# Altium PCB PCB2.PcbDoc
Units mm, origin at the board's own origin, x right, y up, seen from the top; angles counter-clockwise.
Board outline 98.2 x 49.05 mm, 2 copper layers (Top Layer, Bottom Layer); 60 components, 0 nets, 194 pads, 48 vias.
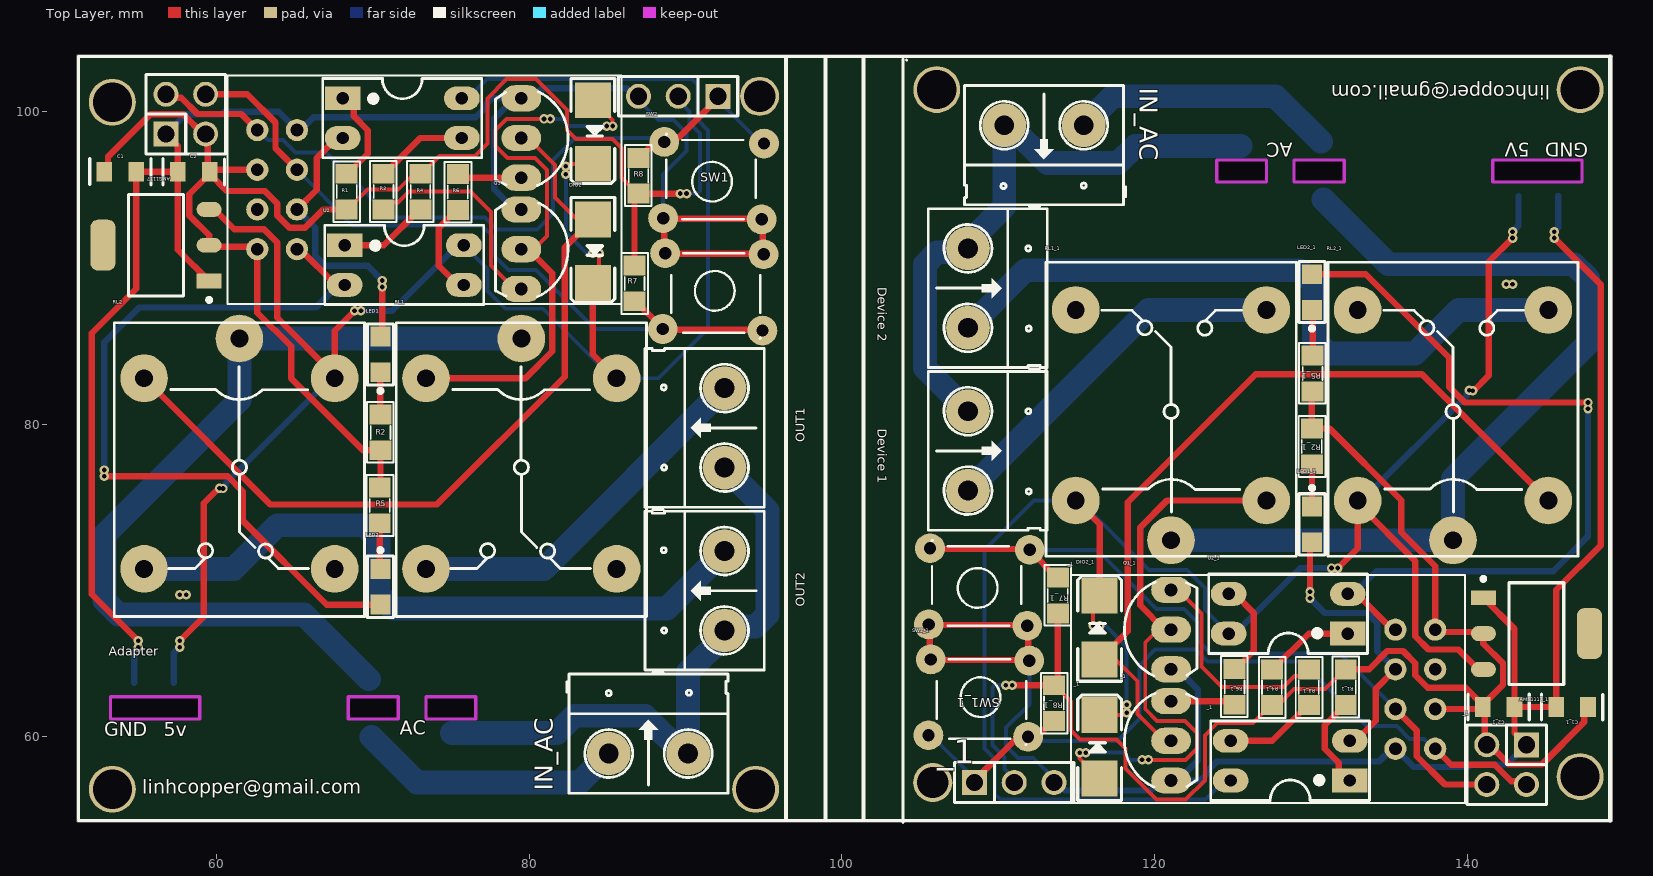
[diagram p0: Top Layer view]
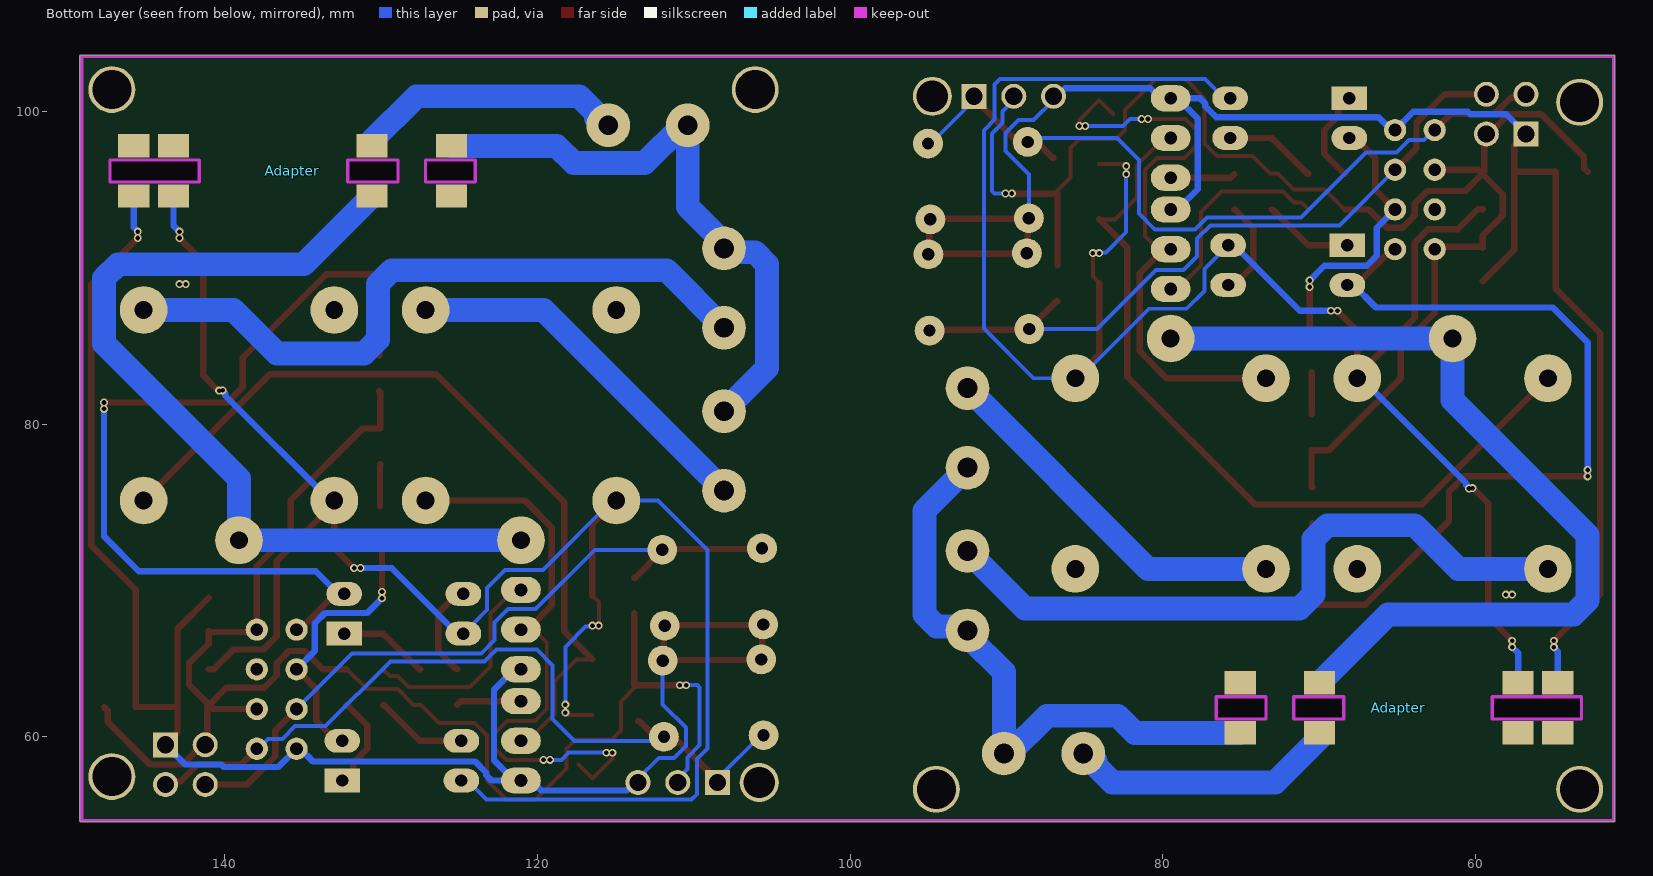
[diagram p1: Bottom Layer view, seen from below]

## Layer stack, top to bottom
Top Solder: solder mask 0.0102, Solder Resist, Dk 3.5
Top Layer: signal copper 0.0356
Dielectric 1: dielectric 0.32, FR-4, Dk 4.8
Bottom Layer: signal copper 0.0356
Bottom Solder: solder mask 0.0102, Solder Resist, Dk 3.5

## Board outline
51.089,54.696 cw(c51.181,54.737) 51.081,54.737 51.081,103.505 cw(c51.181,103.505) 51.181,103.605 149.181,103.605 cw(c149.181,103.505) 149.281,103.505 149.281,103.504 ccw(c149.181,103.505) 149.281,103.505 149.281,103.504 149.281,54.693 cw(c149.181,54.693) 149.28,54.674 cw(c149.181,54.655) 149.281,54.655 cw(c149.181,54.655) 149.181,54.555 51.181,54.555 cw(c51.181,54.655)

## Design rules (kind name [scope] priority, off if disabled: settings)
Clearance [All] p1: gap=0.254 ignorepadtopadclearanceinfootprint=FALSE except(0: Arc-Hole Track-Hole SMDPad-Hole THPad-Hole Via-Hole Fill-Hole Poly-Hole Region-Hole Text-Hole)
PolygonConnect [All] p1: connectstyle=Relief reliefconductorwidth=0.254 reliefentries=4 polygonreliefangle="90 Angle" airgapwidth=0.254
RoutingVias [All] p1: holewidth=0.711 width=1.27 viastyle="Through Hole" minholewidth=0.711 minwidth=1.27 maxholewidth=0.711 maxwidth=1.27
SolderMaskExpansion [All] p1: expansion=0.102 istentingtop=FALSE
Width [All] p1: maxlimit=0.254 minlimit=0.254 preferedwidth=0.254
30 further rules are at their usual default settings.

## Components (designator, comment, footprint, x,y, rotation, side; value= is the part's Value field where it differs from the comment)
_1 "JP3" JP3-D1T 108.483,57.074 r0 top (schematic designator C4)
_1 "Power" JP2-D2T 142.519,58.217 r180 top locked (schematic designator C3)
_1 "ESP-01" ESP8266 136.5,62.992 r270 top locked (schematic designator U3)
_1 "PC817" DIP4 132.486,57.201 r90 top locked (schematic designator U1)
_1 "2SC1815" TO92-123 121.056,59.741 r90 top locked value=C1815 (schematic designator Q2)
_1 "Diode SMD" DIO-SMD-106 116.484,59.36 r270 top locked value=1N5007 (schematic designator DIO1)
Adapter "power_220v_to_5v" POWER_220V_TO_5V 136.931,96.19 r270 top
Adapter "power_220v_to_5v" POWER_220V_TO_5V 63.627,61.849 r90 top
AMS1117 "AMS1117-3.3" Advanced_Monolithic_Systems_AMS1117_IPC_A 56.134,91.44 r180 top locked
AMS1117_1 "AMS1117-3.3" Advanced_Monolithic_Systems_AMS1117_IPC_A 144.424,66.599 r0 top locked (schematic designator AMS1117)
C1 "Capacitor Ceramic" C0805 53.848,96.139 r180 top value=33p
C1_1 "Capacitor Ceramic" C0805 146.71,61.9 r0 top value=33p (schematic designator C1)
C2 "Capacitor Ceramic" C0805 58.547,96.139 r0 top locked value=33p
C2_1 "Capacitor Ceramic" C0805 142.011,61.9 r180 top locked value=33p (schematic designator C2)
C3 "Power" JP2-D2T 58.039,99.822 r0 top locked
C4 "JP3" JP3-D1T 92.075,100.965 r180 top locked
"Device 1" "" HED2 108.064,80.823 r270 top locked value="Header 2" (schematic designator OUT1)
"Device 2" "" HED2 108.064,91.237 r270 top locked value="Header 2" (schematic designator OUT2)
DIO1 "Diode SMD" DIO-SMD-106 84.074,98.679 r90 top locked value=1N5007
DIO2 "Diode SMD" DIO-SMD-106 84.074,91.059 r90 top value=1N5007
DIO2_1 "Diode SMD" DIO-SMD-106 116.484,66.98 r270 top value=1N5007 (schematic designator DIO2)
IN_AC "" HED2 115.468,99.111 r180 top value="Header 2"
IN_AC "" HED2 85.09,58.928 r0 top value="Header 2"
LED1 "" LED0805 70.485,84.455 r90 top locked
LED1_1 "" LED0805 130.073,73.584 r270 top locked (schematic designator LED1)
LED2 "" LED0805 70.485,69.596 r270 top
LED2_1 "" LED0805 130.073,88.443 r90 top (schematic designator LED2)
OUT1 "" HED2 92.494,77.216 r90 top locked value="Header 2"
OUT2 "" HED2 92.494,66.802 r90 top locked value="Header 2"
Q1 "2SC1815" TO92-123 79.502,91.186 r270 top locked value=C1815
Q1_1 "2SC1815" TO92-123 121.056,66.853 r90 top locked value=C1815 (schematic designator Q1)
Q2 "2SC1815" TO92-123 79.502,98.298 r270 top locked value=C1815
R1 "" SM-0805 68.326,94.869 r90 top locked value=1K
R1_1 "" SM-0805 132.232,63.17 r270 top locked value=1K (schematic designator R1)
R2 "" SM-0805 70.496,79.466 r270 top value=1K
R2_1 "" SM-0805 130.062,78.573 r90 top value=1K (schematic designator R2)
R3 "" SM-0805 70.688,94.869 r270 top locked value=1K
R3_1 "" SM-0805 129.87,63.17 r90 top locked value=1K (schematic designator R3)
R4 "" SM-0805 73.05,94.869 r270 top locked value=1K
R4_1 "" SM-0805 127.508,63.17 r90 top locked value=1K (schematic designator R4)
R5 "" SM-0805 70.449,74.803 r90 top value=1K
R5_1 "" SM-0805 130.11,83.236 r270 top value=1K (schematic designator R5)
R6 "" SM-0805 75.438,94.844 r90 top value=1K
R6_1 "" SM-0805 125.12,63.195 r270 top value=1K (schematic designator R6)
R7 "" SM-0805 86.741,89.002 r90 top value=1K
R7_1 "" SM-0805 113.817,69.037 r270 top value=1K (schematic designator R7)
R8 "" SM-0805 86.995,95.885 r270 top value=1K
R8_1 "" SM-0805 113.563,62.154 r90 top value=1K (schematic designator R8)
RL1 "Relay 10A/12V" RL_SPDT_10A 79.502,85.471 r270 top locked value="Relay SPDT, 10A, 12V"
RL1_1 "Relay 10A/12V" RL_SPDT_10A 121.056,72.568 r90 top locked value="Relay SPDT, 10A, 12V" (schematic designator RL1)
RL2 "Relay 10A/12V" RL_SPDT_10A 61.468,85.471 r270 top locked value="Relay SPDT, 10A, 12V"
RL2_1 "Relay 10A/12V" RL_SPDT_10A 139.09,72.568 r90 top locked value="Relay SPDT, 10A, 12V" (schematic designator RL2)
SW1 "SW" SW4 88.697,90.932 r0 top locked value="Button chip 4 pin"
SW1_1 "SW" SW4 111.862,67.107 r180 top locked value="Button chip 4 pin" (schematic designator SW1)
SW2 "SW" SW4 94.869,93.091 r180 top locked value="Button chip 4 pin"
SW2_1 "SW" SW4 105.689,64.948 r0 top locked value="Button chip 4 pin" (schematic designator SW2)
U1 "PC817" DIP4 68.072,100.838 r270 top locked
U2 "PC817" DIP4 68.199,91.44 r270 top locked
U2_1 "PC817" DIP4 132.359,66.599 r90 top locked (schematic designator U2)
U3 "ESP-01" ESP8266 64.059,95.047 r90 top locked

## Footprints (in the part's own frame and the unit in brackets; to place one, negate y for a bottom-side part, rotate by r counter-clockwise, add the part's x,y. Pads: shape width x height; smd on the part's side, far side on the other; paste and mask are expansions set on the pad)
Advanced_Monolithic_Systems_AMS1117_IPC_A [mm]
  rect 1.604x0.952 smd paste+0 mask+0: 1(-3.395,2.29)
  rrect100% 1.604x0.952 smd paste+0 mask+0: 2(-3.395,0) 3(-3.395,-2.29)
  rrect59% 1.604x3.262 smd paste+0 mask+0: 4(3.395,0)
  silkscreen extent -3.52,-3.25 1.75,3.62, body extent -4.7,-3.75 4.7,3.75, height 0.25
C0805 [mm] "Chip Resistor; Body 2.0 x 1.3 mm (LxW typ)"
  rect 1x1.27 smd: 1(-1.016,0) 2(1.016,0)
  silkscreen extent -1.96,-0.84 1.96,0.84, body extent -1,-0.62 1,0.63, height 0.78
DIO-SMD-106 [mil]
  rect 90x90.55 smd: 1(80,0) 2(-80,0)
  silkscreen extent -130,-55 135,55, body extent -99,-50 106,52, height 95
DIP4 [mil]
  rect 60x90 hole 31: 1(0,0)
  oval 60x90 hole 31: 2(100,0) 3(100,300) 4(0,300)
  silkscreen extent -50,-50 150,350, body extent -59,-10 159,305, height 170
ESP8266 [mil]
  round 56 hole 32: 1(148,57) 2(48,57) 3(-52,57) 4(-152,57) 5(-152,-43) 6(-52,-43) 7(48,-43) 8(148,-43)
  silkscreen extent -290,-860 285,132, body extent -290,-858 281,118, height 566
HED2 [mil] "Header 2, 2 pin, hight 300mil, Pin to Pin 200, Colour Green"
  round 110 hole 50: 1(0,0) 2(200,0)
  silkscreen extent -106,-100 300,200, body extent -92,-140 302,155, height 394
JP2-D2T [mm] "4 pins, dual pin, straight, gold plating"
  rect 1.6x1.6 hole 1.1: 1(-1.27,-1.27)
  round 1.6 hole 1.1: 2(1.27,-1.27) 3(1.27,1.27) 4(-1.27,1.27)
  silkscreen extent -2.54,-2.54 2.54,2.54, body extent -2.54,-2.54 2.54,2.54, height 8.55
JP3-D1T [mm] "3 pins, 1 row, straight, gold plating"
  rect 1.6x1.6 hole 1.1: 1(0,0)
  round 1.6 hole 1.1: 2(2.54,0) 3(5.08,0)
  silkscreen extent -1.27,-1.27 6.35,1.27, body extent -1.27,-1.27 6.35,1.27, height 8.54
LED0805 [mil] "Chip Resistor; Body 2.0 x 1.3 mm (LxW typ)"
  rect 50x50 smd: 1(-45,0) 2(45,0)
  silkscreen extent -97,-33 77,33, body extent -60,-25 60,25, height 47
POWER_220V_TO_5V [mm]
  rect 1.5x2 smd far side: 1(-1.601,-11.43) 1(1.601,-11.43) 2(-1.601,-6.35) 2(1.601,-6.35) 3(-1.601,6.35) 3(1.601,6.35) 4(-1.601,8.89) 4(1.601,8.89)
  Keep-Out Layer board cut-out: -0.711,4.699 -0.711,10.414 0.711,10.414 0.711,4.699
  Keep-Out Layer board cut-out: -0.711,-7.976 0.711,-7.976 0.711,-4.801 -0.711,-4.801
  Keep-Out Layer board cut-out: -0.711,-12.954 0.711,-12.954 0.711,-9.779 -0.711,-9.779
  Keep-Out Layer lines w0.2: 0.711,-12.954 0.711,-9.779 -0.711,-9.779 -0.711,-12.954 0.711,-12.954 ; 0.711,-8.001 0.711,-4.801 -0.711,-4.801 -0.711,-8.001 0.711,-8.001 ; 0.711,4.699 -0.711,4.699 -0.711,10.414 0.711,10.414 0.711,4.699
RL_SPDT_10A [mil] "Relay SPDT, 5 pin, 10A,W 650mil, L 800mil, H 800mil"
  round 120 hole 45: 1(0,0) 2(580,240) 3(580,-240) 4(100,-240) 5(100,240)
  silkscreen extent -40,-315 700,315, body extent -33,-297 703,297, height 588
SM-0805 [mil] "Compoment SMD 80x50mil"
  rect 50x55 smd: 1(-45,0) 2(45,0)
  silkscreen extent -77,-34 76,33, body extent -40,-27 40,23, height 24
SW4 [mil] "SW button 4pin, 250 x250 mil"
  round 75 hole 31: 1(0,0) 2(245,-195) 3(248,-3) 4(-6,-191)
  silkscreen extent 15,-215 240,0, body extent -36,-220 276,24, height 276
TO92-123 [mil] "TO-92"
  oval 66x100 hole 32: 1(-100,0) 2(0,0) 3(100,0)
  silkscreen extent -117,-65 120,118, body extent -109,-66 109,95, height 245

## Part data
_1 C4: "WR-PHD 2.54 mm Angled Socket Header", Manufacturer="W¨¹rth Elektronik eiSos GmbH", partNo=613003143121, ComponentLink1 Description=Manufacturer, ComponentLink1URL=http://www.we-online.com, ComponentLink2 Description=Datasheet, ComponentLink2URL=http://katalog.we-online.de/em/datasheet/6130xx143121.pdf, Created by="Karrer Zheng", Created Date="29 March 2013", NoPins=03
_1 C3: library part JP2x2, "WR-PHD 2.54 mm Dual Socket Header", Manufacturer="W¨¹rth Elektronik eiSos GmbH", partNo=61300421821, ComponentLink1 Description=Manufacturer, ComponentLink1URL=http://www.we-online.com, ComponentLink2 Description=Datasheet, ComponentLink2URL=http://katalog.we-online.de/em/datasheet/6130xx21821.pdf, Created by="Karrer Zheng", Created Date="29 March 2013", NoPins=04
_1 U3: library part ESP8266-01, "ESP-12 Wi-Fi Module"
_1 U1 U2 U2_1: "Single Opto"
_1 Q1 Q1_1 Q2: "NPN 600mW, ECB"
_1 DIO1 DIO2 DIO2_1: "Default Diode", Code - JEDEC=DO-214-AB, Published=8-Jun-2000, Publisher="Altium Limited", Revision="July-2002: Re-released for DXP Platform."
C1 C1_1 C2 C2_1: library part CapSMD, "Capacitor", LatestRevisionDate=17-Jul-2002, LatestRevisionNote="Re-released for DXP Platform.", PackageReference=RAD-0.3, Published=8-Jun-2000, Publisher="Altium Limited"
"Device 1" "Device 2" IN_AC IN_AC OUT1 OUT2: library part Hed2, "Header 2 (Green)"
LED1 LED1_1 LED2 LED2_1: library part LED0805, "LED SMD 0805"
R1 R1_1 R2 R2_1 R3 R3_1 R4 R4_1 R5 R5_1 R6 R6_1 R7 R7_1 R8 R8_1: library part RM, "Resistor SMD"
RL1 RL1_1 RL2 RL2_1: library part "Relay 1", "Relay SPDT,10A - 12VDC 5 Pin"
SW1 SW1_1 SW2 SW2_1: library part SW4, "Switch button 4 pin"

## Free pads (board coordinates)
  round 3 hole 2.5: 1(53.34,56.642) 1(53.34,100.584) 1(94.488,56.642) 1(106.07,101.397) 1(147.218,57.455) 1(147.218,101.397)
  round 2.5 hole 2: 1(94.742,100.965) 1(105.816,57.074)

## Via types
v1: diameter 0.6/0.508 (per signal layer), hole 0.3, Top Layer to Bottom Layer, tented both sides, 48 vias

## Nets (pads, with @x,y where several pads share a name; then routed paths per layer and width w, separated by ;. In a path a pad name is that pad's centre, name@x,y a point inside that pad or via, vN(x,y) a via of type N, cw(c..) or ccw(c..) an arc to the next point about the centre after c; other vN are vias at no path point)
pads on no net: "Device 1.1" "Device 1.2" "Device 2.1" "Device 2.2" _1.1 _1.2 _1.3 _1.4 _1.5 _1.6 _1.7 _1.8 Adapter.1 Adapter.2 Adapter.3 Adapter.4 AMS1117.1 AMS1117.2 AMS1117.3 AMS1117.4 AMS1117_1.1 AMS1117_1.2 AMS1117_1.3 AMS1117_1.4 C1.1 C1.2 C1_1.1 C1_1.2 C2.1 C2.2 C2_1.1 C2_1.2 C3.1 C3.2 C3.3 C3.4 C4.1 C4.2 C4.3 DIO1.1 DIO1.2 DIO2.1 DIO2.2 DIO2_1.1 DIO2_1.2 IN_AC.1 IN_AC.2 LED1.1 LED1.2 LED1_1.1 LED1_1.2 LED2.1 LED2.2 LED2_1.1 LED2_1.2 OUT1.1 OUT1.2 OUT2.1 OUT2.2 Q1.1 Q1.2 Q1.3 Q1_1.1 Q1_1.2 Q1_1.3 Q2.1 Q2.2 Q2.3 R1.1 R1.2 R1_1.1 R1_1.2 R2.1 R2.2 R2_1.1 R2_1.2 R3.1 R3.2 R3_1.1 R3_1.2 R4.1 R4.2 R4_1.1 R4_1.2 R5.1 R5.2 R5_1.1 R5_1.2 R6.1 R6.2 R6_1.1 R6_1.2 R7.1 R7.2 R7_1.1 R7_1.2 R8.1 R8.2 R8_1.1 R8_1.2 RL1.1 RL1.2 RL1.3 RL1.4 RL1.5 RL1_1.1 RL1_1.2 RL1_1.3 RL1_1.4 RL1_1.5 RL2.1 RL2.2 RL2.3 RL2.4 RL2.5 RL2_1.1 RL2_1.2 RL2_1.3 RL2_1.4 RL2_1.5 SW1.1 SW1.2 SW1.3 SW1.4 SW1_1.1 SW1_1.2 SW1_1.3 SW1_1.4 SW2.1 SW2.2 SW2.3 SW2.4 SW2_1.1 SW2_1.2 SW2_1.3 SW2_1.4 U1.1 U1.2 U1.3 U1.4 U2.1 U2.2 U2.3 U2.4 U2_1.1 U2_1.2 U2_1.3 U2_1.4 U3.1 U3.2 U3.3 U3.4 U3.5 U3.6 U3.7 U3.8
copper on no net: | length 1640.8
  Top Layer w0.254: 68.326,93.726 68.389,93.726 69.659,94.996 71.628,94.996 72.644,96.012 73.05,96.012 73.114,96.012 74.257,97.155 76.546,97.155 77.343,97.952 77.343,100.835 78.565,102.057 80.442,102.057 82.423,100.076 82.423,98.806 83.001,98.228 85.325,98.228 85.903,97.65 85.903,95.771 86.931,94.742 ; 70.688,93.726 71.125,94.163 71.615,94.163 72.321,94.869 76.25,94.869 77.564,93.555 77.564,90.152 79.07,88.646 79.502,88.646 ; 79.502,91.186 79.934,91.186 80.319,91.186 81.153,92.02 81.153,96.263 80.388,97.028 78.616,97.028 77.851,97.793 77.851,98.803 78.565,99.517 v1(80.95,99.517) ; 79.502,98.298 79.934,98.298 81.661,96.571 81.661,96.474 ; 81.661,96.473 81.661,94.488 83.058,93.091 84.067,93.091 ; v1(82.342,96.496) 82.398,96.552 82.422,96.552 82.517,96.647 84.074,96.647 ; 83.185,99.822 84.074,100.711 85.344,99.441 v1(85.344,99.06) ; 84.074,89.027 84.48,89.433 v1(84.48,90.932) ; 113.627,63.297 114.656,62.268 114.656,60.389 115.234,59.811 117.557,59.811 118.135,59.233 118.135,57.963 120.117,55.982 121.993,55.982 123.215,57.204 123.215,60.087 124.012,60.884 126.301,60.884 127.444,62.027 127.508,62.027 127.914,62.027 128.93,63.043 130.899,63.043 132.169,64.313 132.232,64.313 ; v1(115.214,58.979) 115.214,58.598 116.484,57.328 117.373,58.217 ; v1(116.078,67.107) 116.078,68.605 116.484,69.012 ; 116.484,61.392 118.042,61.392 118.137,61.487 118.161,61.487 v1(118.217,61.543) ; 116.491,64.948 117.5,64.948 118.897,63.551 118.897,61.565 ; 118.898,61.565 118.898,61.468 120.625,59.741 121.056,59.741 ; v1(119.609,58.522) 121.993,58.522 122.707,59.236 122.707,60.246 121.942,61.011 120.17,61.011 119.405,61.776 119.405,66.018 120.24,66.853 120.625,66.853 121.056,66.853 ; 121.056,69.393 121.488,69.393 122.995,67.886 122.995,64.484 124.309,63.17 128.237,63.17 128.943,63.876 129.433,63.876 129.87,64.313
  Top Layer w0.406: v1(52.832,76.657) 60.712,76.657 61.7,75.67 61.7,73.802 67.048,68.453 70.485,68.453 ; 52.832,96.139 53.063,96.37 53.063,97.092 55.78,99.809 57.88,99.809 59.137,98.552 59.309,98.552 59.436,98.425 59.436,96.131 ; v1(54.991,66.142) 52.019,69.113 52.019,85.801 54.864,88.646 54.864,96.139 57.531,96.139 ; 55.372,82.931 63.449,74.854 74.092,74.854 82.267,83.029 82.267,91.291 84.067,93.091 ; 56.769,98.552 57.531,97.79 57.531,96.139 ; 56.769,101.092 56.978,100.883 57.74,100.883 58.788,99.835 61.582,99.835 62.611,98.806 ; v1(57.658,66.142) 59.182,67.666 59.182,74.93 60.152,75.9 v1(60.198,75.9) ; 59.309,101.092 61.977,101.092 63.779,99.29 63.779,97.638 65.151,96.266 ; 59.529,89.15 57.531,91.148 57.531,96.139 ; 59.529,91.27 59.529,92.084 58.27,93.343 58.27,94.711 59.563,96.004 ; 59.529,93.73 59.855,93.73 61.129,92.456 63.04,92.456 63.881,91.615 63.881,86.794 67.564,83.111 ; 59.633,91.336 62.461,91.336 62.611,91.186 62.611,87.13 64.774,84.966 64.774,82.919 69.371,78.323 70.496,78.323 70.496,75.994 70.449,75.946 ; 62.611,96.266 59.825,96.266 59.563,96.004 ; 65.151,93.726 66.411,94.986 66.411,97.018 67.691,98.298 68.072,98.298 ; 65.202,91.237 65.151,91.186 65.341,91.186 67.627,88.9 68.199,88.9 ; 67.564,82.931 67.564,83.111 ; 68.072,100.838 68.771,100.139 68.771,99.704 69.672,98.803 69.672,97.295 68.389,96.012 68.326,96.012 ; 68.199,91.44 70.701,91.44 72.987,93.726 73.05,93.726 ; 68.326,93.726 66.833,93.726 65.665,92.558 64.667,92.558 63.881,93.344 63.881,94.108 63.082,94.908 60.659,94.908 59.563,96.004 ; v1(68.834,87.249) 67.564,85.979 67.564,83.111 ; 70.449,73.66 70.449,70.775 70.485,70.739 ; 70.485,83.312 70.485,80.62 70.496,80.609 ; 70.485,85.598 70.612,85.725 v1(70.612,88.773) ; 70.688,96.012 70.752,96.012 73.038,98.298 75.692,98.298 ; 73.406,82.931 79.764,82.931 81.483,84.65 81.483,89.637 79.934,91.186 ; 75.438,93.701 75.374,93.701 74.219,92.545 74.219,90.119 75.438,88.9 75.819,88.9 ; 75.438,95.987 75.667,95.758 79.502,95.758 ; 84.074,89.027 84.074,84.455 85.598,82.931 ; 86.741,87.859 86.804,87.859 88.544,86.119 88.544,86.081 88.595,86.03 94.869,86.03 94.92,85.979 ; 86.741,90.145 86.741,94.742 86.931,94.742 86.995,94.742 v1(89.662,94.742) ; 86.995,97.028 87.058,97.028 87.788,97.757 88.359,97.757 88.933,98.331 89.568,98.331 91.948,100.711 92.075,100.711 ; 88.57,93.167 88.608,93.129 ; 94.971,97.993 95.021,97.942 ; 94.996,90.856 94.958,90.894 ; 105.537,60.096 105.588,60.046 ; 105.562,67.183 105.6,67.145 ; 105.639,72.06 105.689,72.009 111.963,72.009 112.014,71.958 112.014,71.92 113.754,70.18 113.817,70.18 ; 108.483,57.328 108.61,57.328 110.991,59.708 111.626,59.708 112.199,60.282 112.771,60.282 113.5,61.011 113.563,61.011 ; v1(110.896,63.297) 113.563,63.297 113.627,63.297 113.817,63.297 113.817,67.894 ; 111.989,64.872 111.95,64.91 ; 114.96,75.108 116.484,73.584 116.484,69.012 ; 116.491,64.948 118.291,66.748 118.291,75.01 126.467,83.185 137.109,83.185 145.186,75.108 ; 120.625,66.853 119.075,68.402 119.075,73.388 120.795,75.108 127.152,75.108 ; 121.056,62.281 124.892,62.281 125.12,62.052 ; 124.739,69.139 125.12,69.139 126.34,67.92 126.34,65.494 125.184,64.338 125.12,64.338 ; 124.866,59.741 127.521,59.741 129.807,62.027 129.87,62.027 ; 127.508,64.313 127.572,64.313 129.857,66.599 132.359,66.599 ; v1(129.946,69.266) 129.946,72.314 130.073,72.441 ; 130.062,77.43 130.073,77.419 130.073,74.727 ; 130.073,87.3 130.11,87.263 130.11,84.379 ; 130.073,89.586 133.51,89.586 138.859,84.237 138.859,82.369 139.847,81.382 v1(147.726,81.382) ; 130.11,82.093 130.062,82.045 130.062,79.716 131.188,79.716 135.784,75.12 135.784,73.072 137.947,70.909 137.947,66.853 138.097,66.703 140.925,66.703 ; v1(131.724,70.79) 132.994,72.06 132.994,74.928 ; 132.232,62.027 132.169,62.027 130.886,60.744 130.886,59.236 131.788,58.334 131.788,57.9 132.486,57.201 ; 132.232,64.313 133.725,64.313 134.894,65.481 135.891,65.481 136.677,64.695 136.677,63.93 137.477,63.131 139.899,63.131 140.995,62.035 ; 132.359,69.139 132.931,69.139 135.217,66.853 135.407,66.853 135.357,66.802 ; 132.486,59.741 132.867,59.741 134.147,61.021 134.147,63.053 135.407,64.313 ; 132.994,75.108 132.994,74.928 ; 135.407,61.773 136.779,60.401 136.779,58.749 138.581,56.947 141.249,56.947 ; 137.947,59.233 138.976,58.204 141.77,58.204 142.818,57.156 143.58,57.156 143.789,56.947 ; 137.947,61.773 140.733,61.773 140.995,62.035 ; v1(140.36,82.139) 140.406,82.139 141.376,83.109 141.376,90.373 v1(142.9,91.897) ; 141.029,64.309 140.703,64.309 139.429,65.583 137.519,65.583 136.677,66.424 136.677,71.245 132.994,74.928 ; 141.029,66.769 141.029,65.955 142.289,64.695 142.289,63.328 140.995,62.035 ; 141.029,68.889 143.027,66.891 143.027,61.9 ; 141.122,61.908 141.122,59.614 141.249,59.487 141.421,59.487 142.678,58.23 144.779,58.23 147.496,60.946 147.496,61.669 147.726,61.9 ; 143.789,59.487 143.027,60.249 143.027,61.9 ; v1(145.567,91.897) 148.539,88.925 148.539,72.238 145.694,69.393 145.694,61.9 143.027,61.9 ; 88.608,93.129 88.633,93.104 88.633,90.995 88.697,90.932 88.735,90.894 94.958,90.894 ; 88.608,93.129 94.831,93.129 94.869,93.091 94.932,93.027 94.932,90.919 94.958,90.894 ; 105.6,67.145 111.823,67.145 111.862,67.107 111.925,67.043 111.925,64.935 111.95,64.91 ; 105.6,67.145 105.626,67.12 105.626,65.011 105.689,64.948 105.727,64.91 111.95,64.91
  Bottom Layer w0.254: 62.611,98.806 62.675,98.806 63.31,98.171 64.241,98.171 65.054,97.358 67.014,97.358 71.155,93.218 77.172,93.218 77.934,92.456 80.518,92.456 81.534,93.472 81.534,96.901 82.931,98.298 88.392,98.298 ; 65.151,96.266 68.707,92.71 76.962,92.71 77.814,91.858 77.814,90.718 78.667,89.865 80.439,89.865 84.223,86.081 88.544,86.081 ; 75.692,100.838 76.073,100.838 77.292,102.057 89.539,102.057 90.412,102.057 90.754,101.715 90.754,99.474 91.44,98.788 91.44,86.106 88.265,82.931 85.598,82.931 ; 75.819,91.44 75.856,91.44 76.443,90.853 76.443,90.816 77.343,89.916 77.343,88.519 78.486,87.376 80.899,87.376 85.471,82.804 ; v1(81.356,99.517) 82.093,99.517 82.55,99.06 v1(84.963,99.06) ; v1(82.342,95.987) 82.342,92.283 83.644,90.981 84.025,90.981 v1(84.074,90.932) ; 86.995,100.838 86.995,100.711 88.265,99.441 89.243,99.441 90.056,98.628 90.056,97.46 88.57,95.974 88.57,93.167 ; 89.535,100.838 89.535,100.711 90.246,100 90.246,99.264 90.932,98.578 90.932,94.891 90.783,94.742 v1@90.17,94.742 ; 92.075,100.711 94.844,97.942 95.021,97.942 ; 105.537,60.096 105.715,60.096 108.483,57.328 ; v1@110.388,63.297 109.775,63.297 109.626,63.148 109.626,59.461 110.414,58.674 110.414,57.937 111.023,57.328 111.023,57.201 ; 111.989,64.872 111.989,62.065 110.503,60.579 110.503,59.411 111.265,58.649 112.243,58.649 113.563,57.328 113.563,57.201 ; 112.014,71.958 116.335,71.958 120.12,68.174 121.892,68.174 122.744,67.321 122.744,66.181 123.596,65.329 131.851,65.329 135.407,61.773 ; 112.166,59.741 117.627,59.741 119.024,61.138 119.024,64.567 120.04,65.583 122.624,65.583 123.386,64.821 129.404,64.821 133.544,60.681 135.504,60.681 136.317,59.868 137.248,59.868 137.883,59.233 137.947,59.233 ; 114.96,75.108 112.293,75.108 109.118,71.933 109.118,59.251 109.804,58.565 109.804,56.324 110.146,55.982 111.019,55.982 123.266,55.982 124.485,57.201 124.866,57.201 ; 115.087,75.235 119.659,70.663 122.072,70.663 123.215,69.52 123.215,68.123 124.115,67.223 124.115,67.185 124.702,66.599 124.739,66.599 ; v1(115.595,58.979) 118.008,58.979 118.466,58.522 v1(119.202,58.522) ; v1(116.484,67.107) 116.533,67.058 116.914,67.058 118.216,65.756 v1(118.216,62.052)
  Bottom Layer w0.406: v1(52.832,76.657) v1(52.832,77.064) 52.832,85.217 55.067,87.452 66.37,87.452 67.818,88.9 68.199,88.9 ; 54.737,63.45 54.737,65.454 54.991,65.708 v1(54.991,65.735) ; 56.769,98.552 58.026,99.809 60.337,99.809 60.502,99.974 63.983,99.974 65.151,98.806 ; 57.277,63.45 57.277,65.354 v1(57.658,65.735) ; v1(60.421,75.878) 60.421,75.905 60.598,76.083 60.598,76.219 67.31,82.931 67.564,82.931 ; 65.151,93.726 66.319,92.558 66.319,90.768 66.968,90.119 69.672,90.119 v1(70.612,89.179) ; 65.393,98.806 66.206,99.619 76.578,99.619 77.292,100.333 77.292,100.508 77.622,100.838 79.07,100.838 77.775,99.543 77.775,95.021 79.07,93.726 79.502,93.726 ; v1(69.24,87.249) 71.247,87.249 75.438,91.44 75.819,91.44 ; 79.502,100.838 80.172,100.838 80.807,101.473 86.258,101.473 87.02,100.711 ; 113.538,57.328 114.3,56.566 119.752,56.566 120.387,57.201 121.056,57.201 ; 121.056,64.313 121.488,64.313 122.784,63.017 122.784,58.496 121.488,57.201 122.936,57.201 123.266,57.531 123.266,57.706 123.98,58.42 134.352,58.42 135.165,59.233 ; 124.739,66.599 125.12,66.599 129.311,70.79 v1(131.318,70.79) ; v1(129.946,68.859) 130.886,67.92 133.59,67.92 134.239,67.271 134.239,65.481 135.407,64.313 ; 132.359,69.139 132.74,69.139 134.188,70.587 145.491,70.587 147.726,72.822 v1(147.726,80.975) v1(147.726,81.382) ; 132.994,75.108 133.248,75.108 139.96,81.819 139.96,81.956 140.138,82.134 v1(140.138,82.161) ; 135.407,59.233 136.576,58.064 140.056,58.064 140.221,58.23 142.532,58.23 143.789,59.487 ; v1(142.9,92.304) 143.281,92.685 143.281,94.589 ; v1(145.567,92.304) 145.567,92.331 145.821,92.585 145.821,94.589
  Bottom Layer w1.524: 55.372,70.739 61.103,70.739 63.897,73.533 69.465,73.533 70.358,72.64 70.358,69.092 71.251,68.199 88.811,68.199 92.494,71.882 ; 69.751,63.676 65.609,67.818 53.721,67.818 52.832,68.707 52.832,72.898 61.468,81.534 61.468,85.471 79.121,85.471 ; 69.91,59.977 72.814,57.073 83.235,57.073 85.09,58.928 84.746,58.928 84.289,58.47 ; 73.406,70.739 80.937,70.739 92.494,82.296 ; 75.057,60.248 81.788,60.248 82.88,61.341 87.413,61.341 89.826,58.928 90.17,58.928 90.17,64.134 92.494,66.458 92.494,66.802 92.737,67.045 94.477,67.045 95.25,67.818 95.25,74.46 92.494,77.216 ; 108.064,75.743 119.621,87.3 127.152,87.3 ; 108.064,80.823 105.308,83.579 105.308,90.221 106.081,90.994 107.821,90.994 108.064,91.237 108.064,91.58 110.388,93.905 110.388,99.111 110.732,99.111 113.145,96.698 117.678,96.698 118.771,97.791 125.501,97.791 ; 108.064,86.157 111.747,89.84 129.308,89.84 130.2,88.947 130.2,85.399 131.093,84.506 136.662,84.506 139.456,87.3 145.186,87.3 ; 116.27,99.569 115.812,99.111 115.468,99.111 117.323,100.966 127.745,100.966 130.649,98.061 ; 121.437,72.568 139.09,72.568 139.09,76.505 147.726,85.141 147.726,89.332 146.837,90.221 134.95,90.221 130.808,94.363
  other v1: 110.49,63.297 57.658,69.088 58.064,69.088 142.494,88.951 142.9,88.951 90.068,94.742

## Keep-outs
Keep-Out Layer:
  lines w0.2: 149.149,54.635 51.181,54.635 51.181,103.505 149.149,103.505 149.149,54.661

## Other copper
Top Layer:
  region: 145.186,75.108
  region: 55.372,82.931

## Silkscreen, mask and mechanical layers (free items; w line width, h text height)
Top Overlay:
  lines w0.2: 51.181,54.655 149.143,54.655 ; 51.181,54.737 51.181,103.505 149.181,103.505 ; 96.413,54.757 96.415,54.759 ; 103.905,54.534 103.905,103.346 ; 104.143,103.28 104.145,103.282
  lines w0.254: 96.415,54.759 96.415,103.48 ; 98.963,54.759 98.963,103.364 ; 101.393,54.695 101.393,103.364 ; 149.143,54.655 149.143,103.505
  text "linhcopper@gmail.com" at 145.313,101.998 h1.52 r180
  text "AC" at 128.829,98.306 h1.52 r180
  text "5V" at 143.993,98.306 h1.52 r180
  text "GND" at 147.726,98.306 h1.52 r180
  text "AC" at 71.73,59.809 h1.52
  text "GND" at 52.832,59.707 h1.52
  text "5v" at 56.616,59.716 h1.52
  text "linhcopper@gmail.com" at 55.245,56.041 h1.52